# Altium PCB AWSMS_BLE.PcbDoc
Units mil, origin at the board's own origin, x right, y up, seen from the top; angles counter-clockwise.
Board outline 3936.86 x 1417.32 mil, 2 copper layers (Top Layer, Bottom Layer); 50 components, 30 nets, 136 pads, 47 vias.
Unrouted connection lines stored in the file: 1.
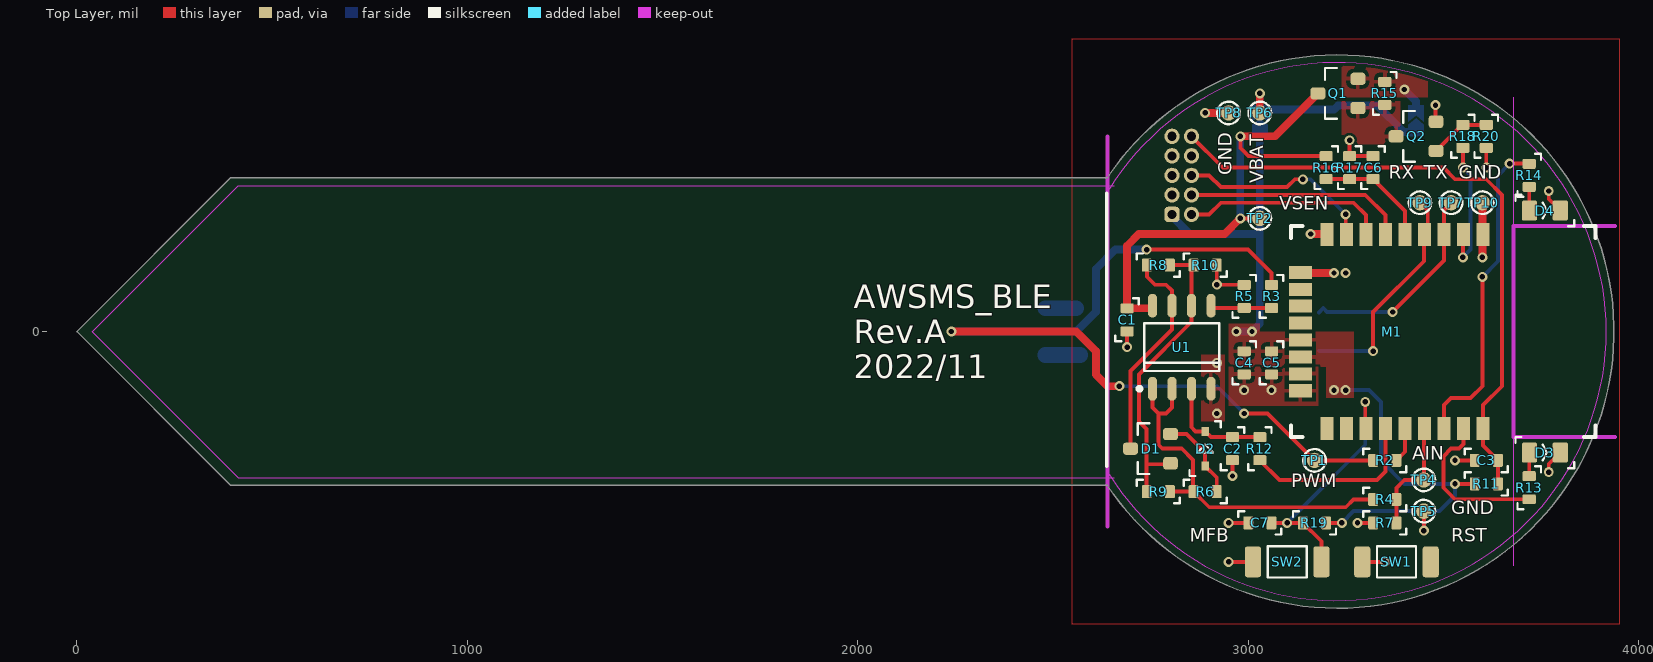
[diagram p0: Top Layer view]
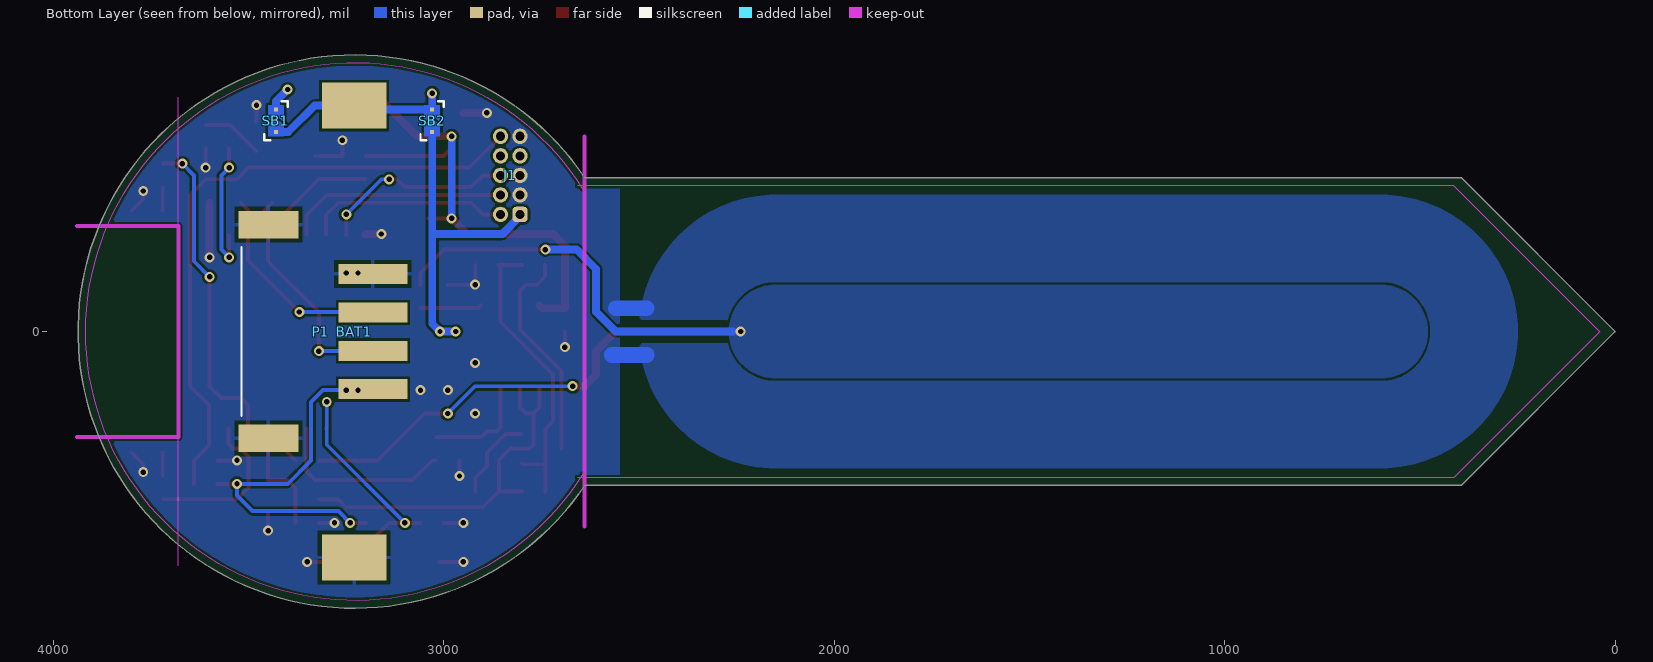
[diagram p1: Bottom Layer view, seen from below]
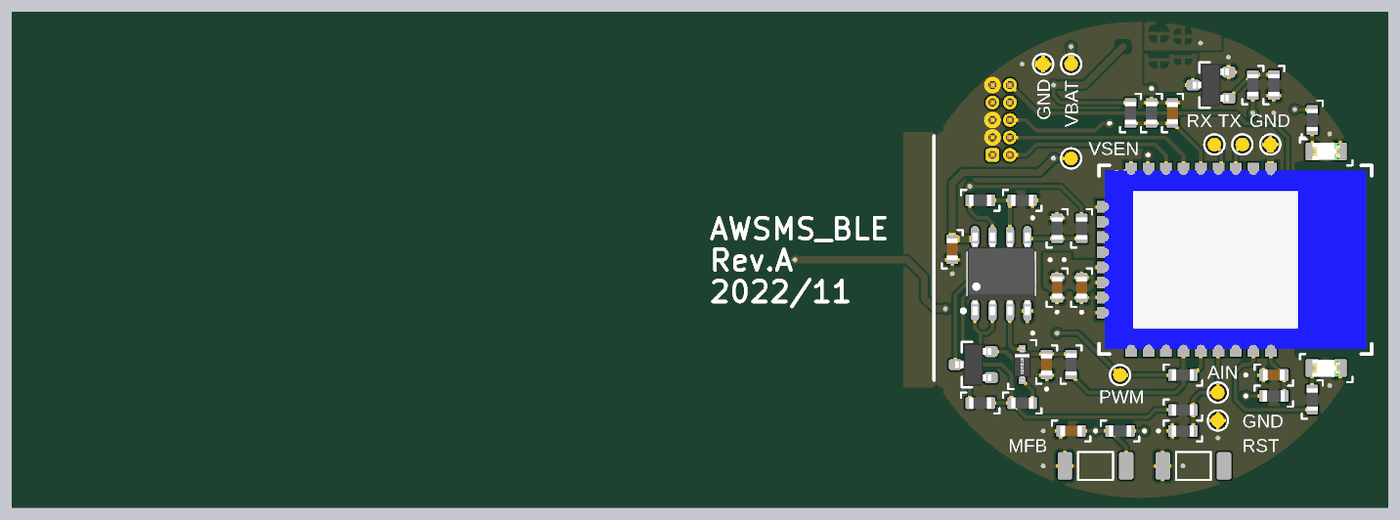
[diagram p2: 3D render of the assembled board from above, using the file's embedded part models]
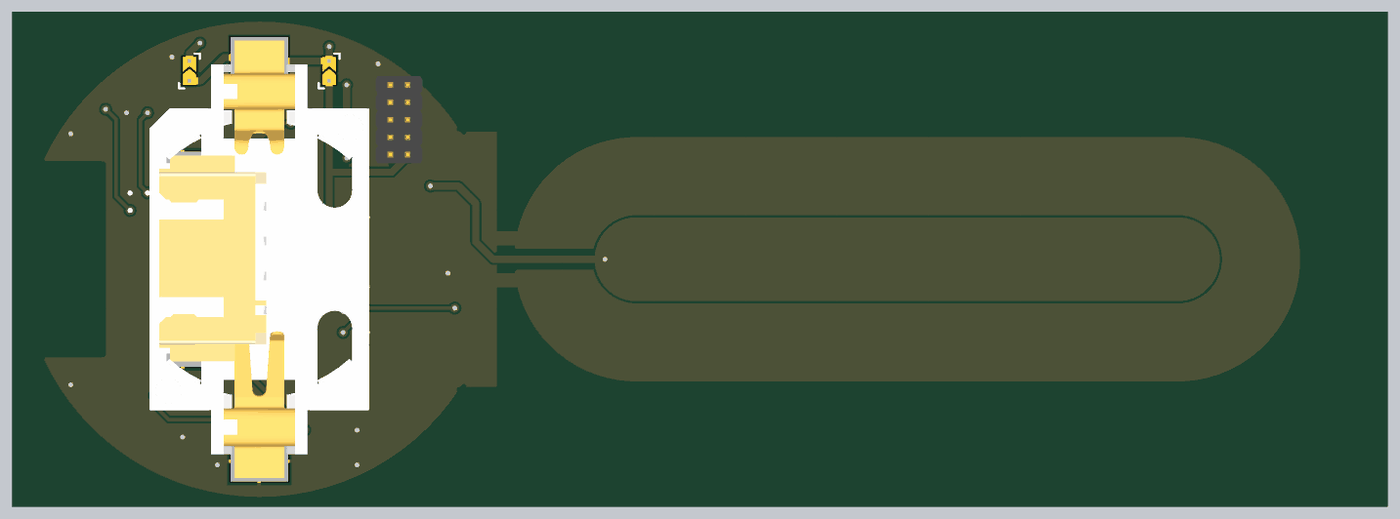
[diagram p3: 3D render of the assembled board from below, using the file's embedded part models]

## Layer stack, top to bottom
Top Solder: solder mask 0.4, Solder Resist, Dk 3.5
Top Layer: signal copper 1.4
Dielectric 1: dielectric 12.6, FR-4, Dk 4.8
Bottom Layer: signal copper 1.4
Bottom Solder: solder mask 0.4, Solder Resist, Dk 3.5

## Board outline
393.7,-393.7 0,0 393.7,393.7 2637.8,393.7 2638.7,393.09 cw(c3228.35,0) 2638.7,-393.09 2637.8,-393.7

## Design rules (kind name [scope] priority, off if disabled: settings)
Clearance [All] p1: gap=6 ignorepadtopadclearanceinfootprint=FALSE
PolygonConnect PolygonConnect_ARM_Header [All vs HasFootprint('ARM_CORTEX_DEBUG_HEADER-1.27-10P-2R')] p1: connectstyle=Direct reliefconductorwidth=10 reliefentries=4 polygonreliefangle="90 Angle" airgapwidth=10
PolygonConnect [All] p2: thpad.connectstyle=Relief thpad.reliefconductorwidth=10 thpad.reliefentries=4 thpad.polygonreliefangle="90 Angle" thpad.airgapwidth=10 smdpad.connectstyle=Relief smdpad.reliefconductorwidth=10 smdpad.reliefentries=4 smdpad.polygonreliefangle="90 Angle" smdpad.airgapwidth=10 via.connectstyle=Direct via.reliefconductorwidth=10 via.reliefentries=4 via.polygonreliefangle="90 Angle" via.airgapwidth=10
RoutingVias [All] p1: holewidth=28 width=50 viastyle="Through Hole" minholewidth=28 minwidth=50 maxholewidth=28 maxwidth=50
SolderMaskExpansion [All] p1: expansion=4
UnRoutedNet [All] p1: checkbadconnections=TRUE
Width [All] p1: maxlimit=100 minlimit=6 preferedwidth=10
29 further rules are at their usual default settings.

## Components (designator, comment, footprint, x,y, rotation, side; value= is the part's Value field where it differs from the comment)
BAT1 "WURTH_79527141" WURTH_79527141_NO_T-SILK 3230,0 r270 bottom locked
C1 "100n" 0603C_RF_M 2690,30 r270 top
C2 "100n" 0603C_RF_M 2960,-300 r270 top
C3 "100n" 0603C_RF_M 3610,-330 r0 top
C4 "100n" 0603C_RF_M 2990,-80 r90 top
C5 "4u7" 0603C_RF_M 3060,-80 r90 top
C6 "100n" 0603C_RF_M 3320,420 r90 top
C7 "100n" 0603C_RF_M 3030,-490 r0 top
D1 "BAT54S" IRLML_SOT-23 2750,-300 r180 top
D2 "BAV21WS" D_SOD-323 2890,-300 r90 top
D3 "Unspecified" 0805LED_RF_M 3760,-310 r180 top
D4 "Unspecified" 0805LED_RF_M 3760,310 r180 top
J1 "ARM_DEBUG_HEADER_10P" ARM_CORTEX_DEBUG_HEADER-1.27-10P-2R_NOMASK 2830,400 r90 bottom
M1 "E104-BT53A3" E104-BT53A3 3500,0 r270 top locked
P1 "JST_XH-4P_SMD" S4BXHSM4TBLFSN 3350,0 r270 bottom
Q1 "FDV304P" IRLML_SOT-23 3230,610 r180 top
Q2 "BC817" IRLML_SOT-23 3430,500 r180 top
R2 "10K" 0603R_RF_M 3350,-330 r180 top
R3 "10K" 0603R_RF_M 3060,90 r270 top
R4 "0R" 0603R_RF_M 3350,-430 r0 top
R5 "D.N.P." 0603R_RF_M 2990,90 r270 top
R6 "10K" 0603R_RF_M 2890,-410 r180 top
R7 "D.N.P." 0603R_RF_M 3350,-490 r0 top
R8 "D.N.P." 0603R_RF_M 2770,170 r180 top
R9 "10K" 0603R_RF_M 2770,-410 r0 top
R10 "D.N.P." 0603R_RF_M 2890,170 r180 top
R11 "10R" 0603R_RF_M 3610,-390 r180 top
R12 "51K" 0603R_RF_M 3030,-300 r90 top
R13 "2K" 0603R_RF_M 3720,-400 r90 top
R14 "2K" 0603R_RF_M 3720,400 r270 top
R15 "33K" 0603R_RF_M 3350,610 r90 top
R16 "? R" 0603R_RF_M 3200,420 r90 top
R17 "? R" 0603R_RF_M 3260,420 r270 top
R18 "? R" 0603R_RF_M 3550,500 r90 top
R19 "10K" 0603R_RF_M 3170,-490 r0 top
R20 "1M" 0603R_RF_M 3610,500 r90 top
SB1 "Solder Bridge" SLDR_BRDG_0603_OPEN 3430,540 r90 bottom
SB2 "Solder Bridge" SLDR_BRDG_0603_OPEN 3030,540 r90 bottom
SW1 "BTN_3x4x2" BTN_3x4x2 3380,-590 r180 top
SW2 "BTN_3x4x2" BTN_3x4x2 3100,-590 r180 top
TP1 "PWM" PAD_R_1MM 3170,-330 r0 top
TP2 "VSEN" PAD_R_1MM 3030,290 r90 top
TP4 "AIN" PAD_R_1MM 3450,-380 r90 top
TP5 "GND" PAD_R_1MM 3450,-460 r90 top
TP6 "VBAT" PAD_R_1MM 3030,560 r90 top
TP7 "TX" PAD_R_1MM 3520,330 r90 top
TP8 "GND" PAD_R_1MM 2950,560 r90 top
TP9 "RX" PAD_R_1MM 3440,330 r90 top
TP10 "GND" PAD_R_1MM 3600,330 r90 top
U1 "MCP6002-I/SN" SOIC-8 2830,-40 r90 top

## Footprints (in the part's own frame and the unit in brackets; to place one, negate y for a bottom-side part, rotate by r counter-clockwise, add the part's x,y. Pads: shape width x height; smd on the part's side, far side on the other; paste and mask are expansions set on the pad)
0603C_RF_M [mm] "Chip Capacitor 0603 Reflow Medium"
  rrect25% 0.65x0.85 smd: 1(-0.75,0) 2(0.75,0)
  silkscreen extent -1.4,-0.76 1.4,0.76, body extent -0.8,-0.4 0.8,0.41, height 0.9
0603R_RF_M [mm] "Chip Resistor 0603 Reflow Medium"
  rrect25% 0.65x0.85 smd: 1(-0.75,0) 2(0.75,0)
  silkscreen extent -1.4,-0.76 1.4,0.76, body extent -0.8,-0.4 0.8,0.4, height 0.55
0805LED_RF_M [mm] "Chip LED 0805 Reflow Medium"
  rrect25% 1x1.3 smd: A(1,0) C(-1,0)
  silkscreen extent -1.91,-1.02 1.91,1.02, body extent -1,-0.62 1,0.63, height 0.7
ARM_CORTEX_DEBUG_HEADER-1.27-10P-2R_NOMASK [mm] "ARM Cortex-M Debug 10-pin Connector 1.27mm Pitch Through Hole"
  rrect50% 1x1 hole 0.6: 1(-2.54,-0.635)
  round 1 hole 0.6: 2(-2.54,0.635) 3(-1.27,-0.635) 4(-1.27,0.635) 5(0,-0.635) 6(0,0.635) 7(1.27,-0.635) 8(1.27,0.635) 9(2.54,-0.635) 10(2.54,0.635)
  body extent -3.17,-1.7 3.18,1.7, height 5.31
BTN_3x4x2 [mm] "Switch Micro SMD 3x4x2 mm Unbranded"
  rrect30% 1.05x2 smd: 1(-2.225,0) 2(2.225,0)
  silkscreen extent -1.27,-1.02 1.27,1.02
D_SOD-323 [mm] "Diode SOD-323"
  rrect25% 0.6x0.5 smd: A(-1.125,0) C(1.125,0)
  silkscreen extent -1.78,-1.02 1.78,1.02, body extent -1.23,-0.63 1.27,0.63, height 1
E104-BT53A3 [mm] "EBYTE Module SoC Bluetooth 5.2 Gecko Wireless"
  rect 1.5x0.85 smd: 1(-6.3,2.58) 2(-6.3,1.31) 3(-6.3,0.04) 4(-6.3,-1.23) 5(-6.3,-2.5) 6(-6.3,-3.77) 7(-6.3,-5.04) 8(-6.3,-6.31) 9(-6.3,-7.58) 18(6.3,-7.58) 19(6.3,-6.31) 20(6.3,-5.04) 21(6.3,-3.77) 22(6.3,-2.5) 23(6.3,-1.23) 24(6.3,0.04) 25(6.3,1.31) 26(6.3,2.58)
  rect 0.85x1.5 smd: 10(-3.85,-9.3) 11(-2.75,-9.3) 12(-1.65,-9.3) 13(-0.55,-9.3) 14(0.55,-9.3) 15(1.65,-9.3) 16(2.75,-9.3) 17(3.85,-9.3)
  silkscreen extent -6.86,-9.91 6.86,9.91, body extent -6.5,-9.5 6.5,9.5, height 2.55
IRLML_SOT-23 [mm] "Infineon's IRLML Series Logic-Level Transistor SOT-23"
  rrect50% 0.97x0.8 smd: 1(-1.3,0.95) 2(-1.3,-0.95) 3(1.3,0)
  silkscreen extent 0.08,-1.65 0.84,1.65, body extent -1.32,-1.52 1.32,1.52, height 1.12
PAD_R_1MM [mm] "Pad Rounded 1mm"
  round 1 smd paste-10: 1(0,0)
  silkscreen extent -0.73,-0.74 0.74,0.74
S4BXHSM4TBLFSN [mm]
  rect 1.3x4.5 smd: 1(-3.75,4.275) 2(-1.25,4.275) 3(1.25,4.275) 4(3.75,4.275)
  rect 1.8x3.9 smd: MNT(-6.95,-2.525) MNT(6.95,-2.525)
  silkscreen extent -5.5,-4.28 5.5,-4.28, body extent -7.56,-4.24 7.44,5.76, height 6.01
SLDR_BRDG_0603_OPEN [mil] "Solder Bridge / Resistor SMD 0603 (Open)"
  rect 10x10 smd: 1(-28.54,0) 2(28.54,0)
  Top Layer region: -40,20 -10.67,20 6,0 -10.67,-20 -40,-20
  Top Layer region: -2.67,20 14,0 -2.67,-20 40,-20 40,20
  silkscreen extent -50,-30 50,30
SOIC-8 [mm]
  oval 1.55x0.6 smd: 1(-2.7,1.905) 2(-2.7,0.635) 3(-2.7,-0.635) 4(-2.7,-1.905) 5(2.7,-1.905) 6(2.7,-0.635) 7(2.7,0.635) 8(2.7,1.905)
  silkscreen extent -2.82,-2.45 1.55,2.88, body extent -3,-2.45 3,2.45, height 1.75
WURTH_79527141_NO_T-SILK [mm] "BATT HOLDER COIN 20MM 1 CELL SMD"
  rect 3x4.2 smd: N(14.7,0) P(-14.7,0)
  body extent -15.95,-8 15.95,8, height 5.66

## Part data
BAT1: "BATT HOLDER COIN 20MM 1 CELL SMD", Manufacturer="Wurth Electronik", Manufacturer Part No=79527141, Cell Type=CR2032, Mounting Technology=SMT
C1 C2 C3 C4 C5 C6 C7: library part C, "Capacitor", Manufacturer="Generic Brand", Max Voltage="? V", Tolerance=?, Category=Capacitor, Mounting Technology=SMT, Supplier Link=http://
D1: "DIODE ARRAY SCHOTTKY SERIES 30V 0.2A SOT-23", Manufacturer="Diodes Incorporated", Package=SOT-23-3, BaseProduct=BAT54S, DiodeConfiguration="1 Pair Series", MountingTechnology=SMT, Supplier=DigiKey, UnitPrice=$0.18
D2: "DIODE GEN PURP 200V 200MA SOD323", Manufacturer=Diotec, Manufacturer Product Number=BAV21WS-7-F, Package=SOD-323, Supplier Part No=9000771572, Mounting Technology=SMT, Supplier=ChipDip, Supplier URL=https://www.chipdip.by/product/bav21ws-diotec
D3 D4: library part LED, "LED", Forward Voltage Drop="? V", Manufacturer="Generic Brand", Category=Diode, Emitting Color=Unspecified, Mounting Technology=SMT, Supplier Link=http://
J1: "ARM Cortex Debug 10-Pin Header"
M1: "RXTX MOD BLUETOOTH SOC EFR32BG22C224F512GM32"
Q1: "MOSFET P-CH 25V 460MA SOT23", Manufacturer="ON Semiconductor (Fairchild)", Package=SOT-23, Supplier Part No=9000231252, Manufacturer Part No=FDV304P, Mounting Technology=SMT, Supplier=ChipDip, Supplier Link=https://www.chipdip.by/product/fdv304p-2
Q2: library part BC817-40-215, "TRANS NPN 45V 0.5A SOT23", Alternative Supplier Part No=28806907, Collector-Emitter Breakdown Voltage="45V (max.)", Collector Current="500 mA", DC Current Gain="250 @ 100mA, 1V", Manufacturer="Nexperia USA Inc.", Manufacturer Part No=BC817-40,215, Package=SOT-23, Power Dissipation="250 mW", Supplier Part No=1727-2919-1-ND, Alternative Supplier=Chipdip, Alternative Supplier Link=https://www.chipdip.by/product/bc817-40, Category=Transistor/BJT, Datasheet Link=https://assets.nexperia.com/documents/data-sheet/BC817_SER.pdf, Mounting Technology=SMT, Supplier=DigiKey, Supplier Link=https://www.digikey.com/en/products/detail/nexperia-usa-inc/BC817-40-215/763235
R2 R3 R4 R5 R6 R7 R8 R9 R10 R11 R12 R13 R14 R15 R16 R17 R18 R19 R20: library part R, "Resistor", Manufacturer="Generic Brand", Max Voltage="? V", Power Rating="? W", Tolerance=?, Category=Resistor, Mounting Technology=SMT, Supplier Link=http://
SW1 SW2: "Switch Micro SMD 3x4x2 mm Unbranded", Supplier=AliExpress, Supplier Link=https://aliexpress.ru/item/32855106640.html
TP1 TP2 TP4 TP5 TP6 TP7 TP8 TP9 TP10: library part "Test Point", "Test Point / Pad"
U1: "IC OPAMP GP 2 CIRCUIT 8SOIC"

## Via types
v1: diameter 25.59, hole 13.78, Top Layer to Bottom Layer, tented both sides, 47 vias

## Nets (pads, with @x,y where several pads share a name; then routed paths per layer and width w, separated by ;. In a path a pad name is that pad's centre, name@x,y a point inside that pad or via, vN(x,y) a via of type N, cw(c..) or ccw(c..) an arc to the next point about the centre after c; other vN are vias at no path point)
BUFFER_OUT: R4.1 R6.2 R9.2 U1.1 U1.2 | length 971.8
  Top Layer w10: U1.1 2755,-195 2770,-210 ; R9.2 R6.2@2859.16,-410 ; U1.2 2805,-195 2790,-210 2770,-210 ; R4.1 3270,-430 3250,-450 2900.47,-450 R6.2 R6.2@2859.16,-410 ; 2770,-210 2770,-290 2780,-300 2830,-300 2859.16,-329.16 R6.2@2859.16,-410
DSCHRG: M1.21 R12.1 | length 471.8
  Top Layer w10: R12.1@3020,-329.53 3029.53,-329.53 3080,-380 3330,-380 3351.57,-358.43 M1.21
GND: BAT1.N C1.2 C2.2 C3.1 C4.1 C5.1 C6.2 C7.1 D3.C D4.C J1.3 J1.5 J1.9 M1.1 M1.9 M1.10 M1.16 M1.17 P1.1 P1.MNT Q2.2 R5.1 R7.1 R10.1 R17.1 R20.1 SW1.2 SW2.2 TP5.1 TP8.1 TP10.1 U1.4 | length 1332.5
  Top Layer w10: v1(2690,-40) C1.2 ; R10.1 2919.53,120.47 v1(2920,120) 2989.53,120 R5.1 ; v1(2950,-590) SW2.2 ; v1(2950,-490) C7.1 ; v1(2960,-370) C2.2 ; v1(3260,490) R17.1 C6.2 ; v1(3280,-490) R7.1 ; SW1.2 v1(3350,-590) ; v1(3450,-510) TP5.1 ; v1(3480,580) 3480,538.58 Q2.2 ; v1(3530,-330) C3.1 ; v1(3610,420) R20.1 ; v1(3770,-360) 3770,-339.37 D3.C ; v1(3770,360) 3770,339.37 D4.C
  Top Layer w20: v1(2890,560) TP8.1 ; M1.10 3135.43,150 v1(3220,150) ; v1(3160,250) 3199.61,250 M1.9 ; v1(3600,190) M1.1@3600,246.46 ; TP10.1 M1.1@3600,246.46 ; M1.1 M1.1@3600,246.46
  Bottom Layer w40: 2480,-60 2570,-60 ; 2480,60 2560,60
  other v1: 2920,-210 2990,-150 3060,-150 2920,-80 3250,150
HOLDCAP: C2.1 D2.C R12.2 U1.3 | length 274.3
  Top Layer w10: U1.3 2855,-245 2865.71,-255.71 D2.C 2904.76,-270.47 C2.1 R12.2@3020,-270.47
LED1: M1.25 R13.1 | length 417.3
  Top Layer w10: M1.25 3551.57,-288.43 3540,-300 3520,-300 3500,-320 3500,-400 3529.53,-429.53 R13.1
LED2: M1.24 R14.1 | length 827.3
  Top Layer w10: M1.24 3501.57,-188.43 3520,-170 3570,-170 3600,-140 v1(3600,140) ; v1(3670,430) 3719.53,430 R14.1
  Bottom Layer w10: v1(3600,140) 3640,180 3640,400 v1(3670,430)
MFB: C7.2 M1.20 R19.1 SW2.1 | length 662
  Top Layer w10: C7.2 v1(3100,-490) R19.1 3187.6,-537.13 SW2.1 ; v1(3300,-180) 3300,-246.46 M1.20
  Bottom Layer w10: v1(3100,-490) 3300,-290 v1(3300,-180)
MOD_RX: M1.4 P1.3 TP9.1 | length 584.9
  Top Layer w10: v1(3320,-50) 3320,50 3450,180 3450,246.46 M1.4 3460,256.46 3460,310 TP9.1
  Bottom Layer w10: P1.3 3182.48,-50 v1(3320,-50)
MOD_TX: M1.3 P1.2 TP7.1 | length 539
  Top Layer w10: v1(3370,50) 3501.57,181.57 M1.3 3501.57,311.57 TP7.1
  Bottom Layer w10: P1.2 3192.48,60 3202.48,50 v1(3370,50)
NetD3_A: D3.A R13.2 | length 60.7
  Top Layer w10: R13.2 3720,-310.63 D3.A
NetD4_A: D4.A R14.2 | length 60.7
  Top Layer w10: R14.2 3720,310.63 D4.A
NetQ1_1: Q1.1 Q2.3 R15.1
NetQ2_1: Q2.1 R18.2 R20.2 | length 156.5
  Top Layer w10: Q2.1 3548.11,529.53 R18.2 R20.2
NRST: C3.2 J1.10 M1.26 R11.1 SW1.1 | length 1632.9
  Top Layer w10: J1.10 2935,420 3500,420 3530,390 3610,390 3650,350 3650,-140 3601.57,-188.43 M1.26 3601.57,-292.05 C3.2 R11.1
PKD: M1.23 R4.2 R7.2 TP4.1 | length 301.1
  Top Layer w10: R7.2 R4.2 3379.53,-400.47 3400,-380 TP4.1 3450,-249.61 M1.23
PREAMP_IN: R3.2 R5.2 U1.5 | length 157.4
  Top Layer w10: U1.5 2910.83,60.47 R5.2 R3.2
PREAMP_NFB: D1.1 R8.1 R9.1 R10.2 U1.6 | length 769.9
  Top Layer w10: R9.1 2740,-409.53 2740,-340 ; R8.1 R10.2 2855,164.53 U1.6 2855,25 2720,-110 2720,-230 2740,-250 2740,-340 ; D1.1 2798.58,-340 2740,-340
PREAMP_OUT: D1.3 R8.2 U1.7 | length 557.7
  Top Layer w10: D1.3 2698.82,-101.18 2805,5 U1.7 2805,105 2790,120 2760.94,120 2740.47,140.47 R8.2
PWM: M1.22 R2.1 | length 91.1
  Top Layer w10: R2.1 3401.57,-307.95 M1.22
SENSOR_EN: M1.2 R18.1 | length 355.7
  Top Layer w10: v1(3550,190) 3550,246.46 M1.2 ; v1(3550,420) R18.1
  Bottom Layer w10: v1(3550,190) 3570,210 3570,400 v1(3550,420)
SENSOR_P: R2.2 R3.1 TP1.1 | length 2259.1
  Top Layer w10: v1(2740,210) 3000,210 3060,150 R3.1 ; v1(2990,-210) 3050,-210 TP1.1 R2.2
  Top Layer w20: v1(2240,0) 2560,0 2610,-50 2610,-110 2640,-140 v1(2670,-140)
  Bottom Layer w10: v1(2670,-140) 2920,-140 v1(2990,-210)
  Bottom Layer w20: 2260,0 2560,0 2610,50 2610,160 2660,210 v1(2740,210)
SWCLK: J1.4 M1.6 | length 568.3
  Top Layer w10: J1.4 3300,350 3351.57,298.43 M1.6
SWDIO: J1.2 M1.7 | length 522.5
  Top Layer w10: J1.2 2900,300 2930,330 3270,330 3301.57,298.43 M1.7
SWO: J1.6 M1.8 | length 508.8
  Top Layer w10: J1.6 2900,400 2930,370 3100,370 3120,390 v1(3140,390) ; v1(3250,300) 3250,246.46 M1.8
  Bottom Layer w10: v1(3140,390) 3160,390 v1(3250,300)
VBAT: BAT1.P SB1.1 SB2.2 TP6.1 | length 523.5
  Top Layer w20: TP6.1 v1(3030,610)
  Bottom Layer w20: v1(3030,610) SB2.2 3219.8,568.54 BAT1.P 3331.26,578.74 3398.54,511.46 SB1.1
VBAT#: Q1.2 R15.2 SB1.2 | length 63.9
  Bottom Layer w20: v1(3400,620) 3430,590 SB1.2
VDD: C4.2 C5.2 J1.1 M1.14 M1.15 P1.4 R11.2 R19.2 SB2.1 | length 1715.6
  Top Layer w10: R19.2 v1(3240,-490) ; v1(3530,-390) R11.2
  Bottom Layer w10: v1(3240,-490) 3270,-460 3490,-460 3530,-420 v1(3530,-390) 3400,-390 3340,-330 3340,-180 3310,-150 v1(3250,-150)
  Bottom Layer w20: J1.1 2805,295 2850,250 3030,250 ; v1(2970,0) v1(3010,0) 3030,20 3030,250 ; SB2.1 3030,250
  other v1: 3220,-150
VIN: C6.1 M1.5 R16.1 R17.2 | length 296.2
  Top Layer w10: R16.1 R17.2 C6.1 3401.57,308.9 M1.5
VSEN: C1.1 Q1.3 R16.2 TP2.1 U1.8 | length 1320.1
  Top Layer w10: v1(2980,290) TP2.1 TP2.1@3040,290 ; v1(2980,500) 2980,470 3000.47,449.53 R16.2
  Top Layer w20: U1.8 2748.23,59.53 C1.1 2690,220 2720,250 2940,250 v1(2980,290) ; v1(2980,500) 3068.82,500 Q1.3
  Bottom Layer w20: v1(2980,290) v1(2980,500)
XXX: D1.2 D2.A R6.1 | length 220.7
  Top Layer w10: D1.2 2842.6,-262.6 2890,-310 D2.A 2919.53,-373.82 R6.1
pads on no net: J1.7 J1.8 M1.11 M1.12 M1.13 M1.18 M1.19

## Polygon pours and split planes (outlines as drawn)
GND on Top Layer "GND_L01_P000" (solid, remove dead copper, pour order 0): 2950,-90 3180,-90 3180,-190 2950,-190
VDD on Top Layer "VDD_L01_P002" (solid, remove dead copper, pour order 2): 3200,-90 3200,-170 3270,-170 3270,-90 3270,0 3030,0 3030,20 2950,20 2950,0 2950,-90
NetQ1_1 on Top Layer "NETQ1_1_L01_P004" (solid, remove dead copper, pour order 4): 3240,590 3390,590 3390,480 3240,480
VBAT# on Top Layer "VBAT#_L01_P006" (solid, remove dead copper, pour order 6): 3240,600 3250.42,600 3460,600 3460,720 3240,720
GND on Top Layer "GND_L01_P010" (solid, remove dead copper, pour order 10): 2880,-60 2940,-60 2940,-230 2880,-230
GND on Top Layer "NONET_L01_P030" (solid, remove dead copper, shelved, pour order 30): 2550,750 3950,750 3950,-750 2550,-750
SENSOR_P on Bottom Layer "SENSOR_P_L02_P017" (solid, pour order 17): 600,-120 2150,-120 ccw(c2150,0) 2150,120 600,120 ccw(c600,0)
GND on Bottom Layer "GND_L02_P027" (solid, pour order 27): 2150,-350 ccw(c2150,0) 2498.71,-30 2280,-30 2280,30 2498.71,30 ccw(c2150,0) 2150,350 600,350 ccw(c600,0) 250,0 ccw(c600,0) 600,-350
GND on Bottom Layer "GND_L02_P028" (solid, remove dead copper, pour order 28): 2550,750 3950,750 3950,-750 2550,-750

## Keep-outs
Keep-Out Layer:
  lines w3: 2644.06,-365.1 ccw(c3228.35,0) 2644.06,365.1 ; 2657.48,-374.02 413.39,-374.02 39.37,0 413.39,374.02 2657.48,374.02 ; 3680,-600 3680,600
  lines w10: 2640,-500 2640,500 ; 3940,-270 3680,-270 3680,270 3940,270

## Silkscreen, mask and mechanical layers (free items; w line width, h text height)
Top Overlay:
  lines w10: 2637.8,-344.33 2637.8,354.33
  text "AWSMS_BLE" at 1990,60 h60
  text "Rev.A" at 1990,-30 h60
  text "2022/11" at 1990,-120 h60
  text "MFB" at 2850,-550 h60
  text "RST" at 3520,-550 h60
Mechanical 1:
  lines w6: 2637.8,-393.7 393.7,-393.7 0,0 393.7,393.7 2637.8,393.7 ; 2638.7,-393.09 ccw(c3228.35,0) 2638.7,393.09
Mechanical 11:
  circle w10: c2637.8,393.7 r59.06
  circle w10: c2637.8,-393.7 r59.06
  lines w6: 600,-350 cw(c600,0) 600,350 2150,350 cw(c2150,0) 2150,-350 600,-350 ; 600,-150 cw(c600,0) 600,150 2150,150 cw(c2150,0) 2150,-150 600,-150 ; 600,-120 cw(c600,0) 600,120 2150,120 cw(c2150,0) 2150,-120 600,-120 ; 2280,-30 2520,-30 2520,30 2280,30 2280,-30